# Allegro board WDMB-0006A-V01.brd
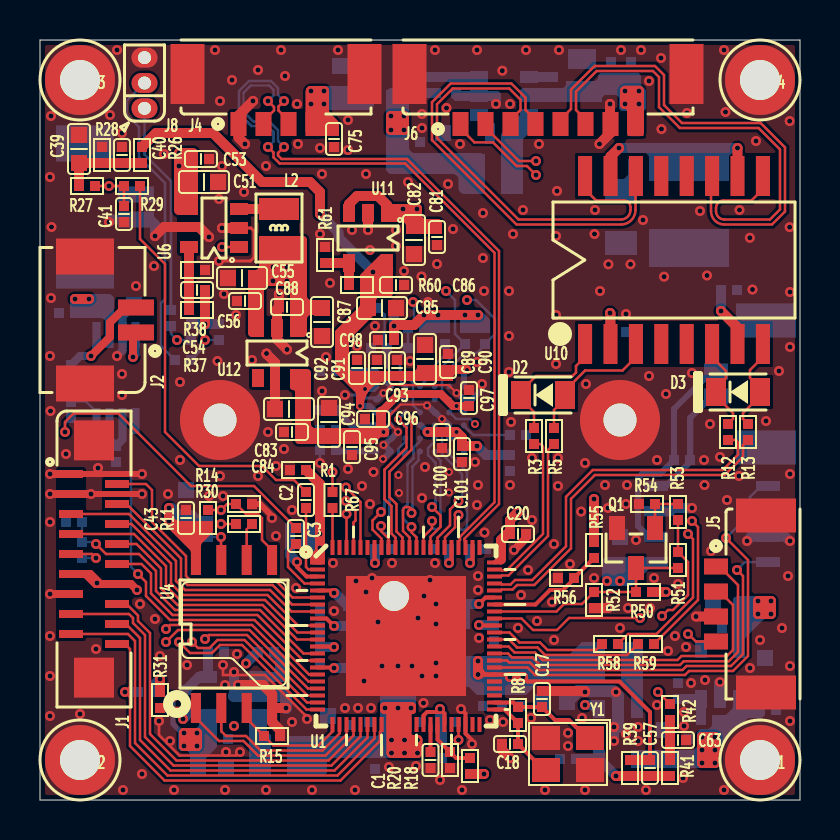
[diagram p0: board, top side]
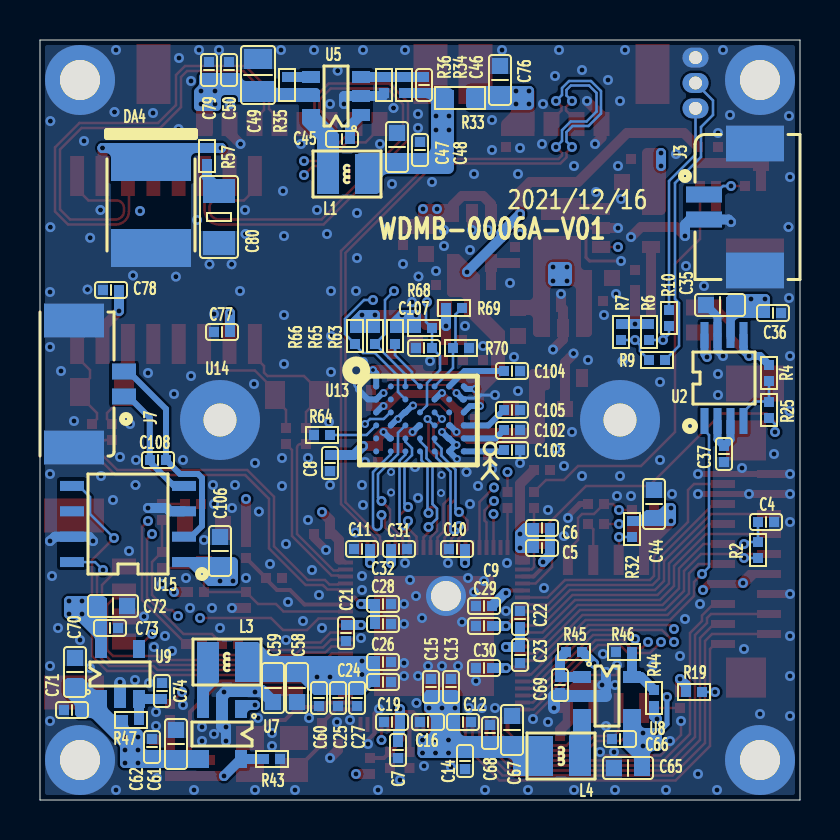
[diagram p1: board, bottom side, seen from below]

Outline 38 x 38 mm; copper layers: TOP, GND, POWER, BOTTOM. Coordinates in mm from the lower left corner of the outline.
Outline path: 0,38 38,38 38,0 0,0 0,38

## Design rules (mm)
net group CAM_RX0_0: nets CAM_RX0_0N CAM_RX0_0P
net group CAM_RX0_1: nets CAM_RX0_1N CAM_RX0_1P
net group CAM_RX0_3: nets CAM_RX0_3N CAM_RX0_3P
net group CAM_RX0_4: nets CAM_RX0_4N CAM_RX0_4P
net group CAM_RX0_CLK: nets CAM_RX0_CLKN CAM_RX0_CLKP
net group DP1: nets N20551619 N20551621
net group DP2: nets N20551631 N20551633
net group DP3: nets USB_DM USB_DP
net group EPHY_RX: nets EPHY_RXN EPHY_RXP
net group EPHY_TX: nets EPHY_TXN EPHY_TXP
net group RX_D: nets RX_D+ RX_D-
net group TX_D: nets TX_D+ TX_D-

## Placement (name value [footprint] x y rotation side)
C1  0.1uF  [C0402]  19.52 2 270 top
C2  2.2uF  [C0402]  13.3 15 270 top
C3  2.2uF  [C0402]  12.8 13.2 90 top
C4  1uF  [C0402]  1.7 13.9 180 bottom
C5  4.7uF  [C0402]  12.9 12.6 180 bottom
C6  0.1uF  [C0402]  12.9 13.6 180 bottom
C7  2.2uF  [C0402]  20.1 2.5 270 bottom
C8  0.1uF  [C0402]  23.5 16.85 270 bottom
C9  0.1uF  [C0402]  15.8 9.7 0 bottom
C10  0.1uF  [C0402]  17.15 12.55 0 bottom
C11  0.1uF  [C0402]  21.9 12.55 0 bottom
C12  4.7uF  [C0402]  16.85 3.9 180 bottom
C13  1uF  [C0402]  17.45 5.65 90 bottom
C14  1uF  [C0402]  16.75 1.95 270 bottom
C15  0.1uF  [C0402]  18.45 5.65 90 bottom
C16  0.1uF  [C0402]  18.6 3.9 0 bottom
C17  12pF  [C0402]  25.1 5.05 90 top
C18  12pF  [C0402]  23.5 2.8 180 top
C19  0.1uF  [C0402]  20.4 3.9 0 bottom
C20  2.2uF  [C0402]  23.9 13.3 0 top
C21  2.2uF  [C0402]  22.7 8.35 270 bottom
C22  0.1uF  [C0402]  14 9.05 90 bottom
C23  0.1uF  [C0402]  14 7.25 270 bottom
C24  4.7uF  [C0402]  20.85 5.9 180 bottom
C25  4.7uF  [C0402]  23.1 5.1 270 bottom
C26  1uF  [C0402]  20.85 6.9 180 bottom
C27  1uF  [C0402]  22.15 5.1 270 bottom
C28  1uF  [C0402]  20.85 8.8 180 bottom
C29  0.1uF  [C0402]  15.8 8.7 0 bottom
C30  0.1uF  [C0402]  15.8 6.6 0 bottom
C31  1uF  [C0402]  20.05 12.55 180 bottom
C32  0.1uF  [C0402]  20.85 9.8 180 bottom
C35  22uF  [C0603]  4 24.75 0 bottom
C36  0.1uF  [C0402]  1.35 24.35 180 bottom
C37  1uF  [C0402]  3.8 17.3 90 bottom
C39  22uF  [C0603]  1.95 32.55 270 top
C40  0.1uF  [C0402]  4.1 32.25 270 top
C41  100pF  [C0402]  4.2 29.3 90 top
C43  0.1uF  [C0402]  7.3 14.1 90 top
C44  22uF  [C0603]  7.3 14.8 90 bottom
C45  0.1uF  [C0402]  22.9 33.05 0 bottom
C46  100pF  [C0402]  18.8 35.75 270 bottom
C47  22uF  [C0603]  20.15 32.65 90 bottom
C48  0.1uF  [C0402]  19 32.5 90 bottom
C49  22uF/16V  [C0805]  27.1 36.25 90 bottom
C50  0.1uF/16V  [C0402]  28.55 36.5 90 bottom
C51  10uF  [C0603]  8.2 30.9 0 top
C53  0.1uF  [C0402]  8.05 32.05 0 top
C54  NC/33pF  [C0402]  7.85 25.5 0 top
C55  22uF  [C0603]  10.1 26.1 180 top
C56  0.1uF  [C0402]  10.25 24.95 180 top
C57  100pF  [C0402]  30.5 1.6 90 top
C58  22uF  [C0603]  25.15 5.6 270 bottom
C59  10uF  [C0603]  26.35 5.6 270 bottom
C60  0.1uF  [C0402]  24.05 5.1 270 bottom
C61  10uF  [C0603]  31.2 2.8 90 bottom
C62  0.1uF  [C0402]  32.4 2.65 90 bottom
C63  2.2uF  [C0402]  31.9 3 0 top
C65  10uF  [C0603]  8.6 1.6 0 bottom
C66  0.1uF  [C0402]  9 3.05 0 bottom
C67  10uF  [C0603]  14.4 3.5 90 bottom
C68  4.7uF  [C0402]  15.5 3.35 90 bottom
C69  0.1uF  [C0402]  12 5.75 270 bottom
C70  10uF  [C0603]  36.25 6.4 90 bottom
C71  0.1uF  [C0402]  36.4 4.5 0 bottom
C72  10uF  [C0603]  34.35 9.7 180 bottom
C73  0.1uF  [C0402]  34.5 8.6 180 bottom
C74  0.1uF  [C0402]  31.9 5.45 90 bottom
C75  0.1uF  [C0402]  14.7 33.05 270 top
C76  22uF  [C0603]  15 36 90 bottom
C77  0.1uF  [C0402]  28.9 23.4 180 bottom
C78  0.1uF  [C0402]  34.45 25.5 180 bottom
C79  0.1uF/16V  [C0402]  29.55 36.5 90 bottom
C80  1nF/2KV  [C1206]  29.05 29.15 90 bottom
C81  0.1uF  [C0402]  19.85 28.15 270 top
C82  10uF  [C0603]  18.7 28 270 top
C83  10uF  [C0603]  12.45 19.55 180 top
C84  0.1uF  [C0402]  12.6 18.4 180 top
C85  10uF  [C0603]  17.1 24.6 0 top
C86  0.1uF  [C0402]  17.8 25.75 0 top
C87  10uF  [C0603]  14.1 23.9 270 top
C88  0.1uF  [C0402]  12.35 24.65 180 top
C89  10uF  [C0603]  19.25 22.05 90 top
C90  4.7uF  [C0402]  20.4 21.9 90 top
C91  0.1uF  [C0402]  16.85 21.6 270 top
C92  0.1uF  [C0402]  15.85 21.6 270 top
C93  0.1uF  [C0402]  17.85 21.6 270 top
C94  10uF  [C0603]  14.45 18.9 90 top
C95  4.7uF  [C0402]  15.6 17.65 270 top
C96  0.1uF  [C0402]  16.65 19.05 0 top
C97  0.1uF  [C0402]  21.45 20.1 270 top
C98  0.1uF  [C0402]  17.3 23 180 top
C100  0.1uF  [C0402]  20.1 18 90 top
C101  4.7uF  [C0402]  21.1 17.3 90 top
C102  2.2uF  [C0402]  14.4 18.5 0 bottom
C103  2.2uF  [C0402]  14.4 17.5 0 bottom
C104  2.2uF  [C0402]  14.4 21.45 0 bottom
C105  2.2uF  [C0402]  14.4 19.5 0 bottom
C106  10uF  [C0603]  29 12.45 90 bottom
C107  0.1uF  [C0402]  18.8 22.6 0 bottom
C108  0.1uF  [C0402]  32.1 17 180 bottom
D2  NC/XXX  [SOD323_1D4X1D8]  25.15 20.25 180 top
D3  NC/XXX  [SOD323_1D4X1D8]  34.9 20.4 180 top
DA4  SMBJ14A  [D_SMB_5D6X4D0]  32.45 29.75 90 bottom
EPAD_HOLE1  H1  [M_1D5_2D0]  17.7 10.2 0 top
H1  H1  [M_2D0_3D5]  36 2 0 top
H2  H1  [M_2D0_3D5]  2 2 0 top
H3  H1  [M_2D0_3D5]  2 36 0 top
H4  H1  [M_2D0_3D5]  36 36 0 top
J1  FPC18/0.5MM  [FPC18_3D5X14D6_1D0]  2.7 12.05 270 top
J2  WB1252B-02R-TAND  [WF2_4D4X7D25_1D25_SMD_L]  4.8 24 270 top
J3  WB1252B-02R-TAND  [WF2_4D4X7D25_1D25_SMD_L]  4.8 29.65 90 bottom
J4  1.25-4ALT  [WF4_3D5X9D5_1D25_SMD_L]  11.8 33.4 180 top
J5  1.25-4ALT  [WF4_3D5X9D5_1D25_SMD_L]  33.4 9.8 90 top
J6  1.25-8ALT  [WF8_3D5X14D5_1D25_SMD_L]  25.4 33.4 180 top
J7  1.25-2ALT  [WF2_3D5X7D0_1D25_SMD_L]  33.4 20.8 270 bottom
J8  Header_M / 3X1 /1.25mm  [JMP_1X3_1D27]  5.22 35.85 90 top
L1  WPN252012H2R2MT_2.2uH_2A  [L1008]  22.65 31.3 180 bottom
L2  WPN252012H2R2MT_2.2uH_2A  [L1008]  11.95 28.6 270 top
L3  WPN252012H1R0MT_1uH_4A  [L1008]  28.65 6.9 180 bottom
L4  WPN252012E1R0MT_1uH_3A  [L1008]  11.95 2.2 0 bottom
Q1  S9013  [SOT23_BEC]  29.8 12.6 180 top
R1  0R  [R0402]  12.9 16.5 180 top
R2  33R  [R0402]  2.1 12.5 270 bottom
R3  5.1R  [R0402]  24.7 18.2 90 top
R4  33K  [R0402]  1.55 21.35 270 bottom
R5  5.1R  [R0402]  25.7 18.2 90 top
R6  4.7K  [R0402]  7.55 23.4 270 bottom
R7  4.7K  [R0402]  8.95 23.4 270 bottom
R8  1M  [R0402]  23.9 4.25 90 top
R9  100R  [R0402]  7.15 22 0 bottom
R10  100R  [R0402]  6.55 24.1 270 bottom
R11  NC/4.7K  [R0402]  8.4 14.1 90 top
R12  5.1R  [R0402]  34.4 18.4 90 top
R13  5.1R  [R0402]  35.4 18.4 90 top
R14  4.7K  [R0402]  10.2 14.8 0 top
R15  4.7K  [R0402]  11.6 3.2 0 top
R18  30K/1%  [R0402]  21.5 1.7 270 top
R19  4.7K  [R0402]  5.3 5.4 180 bottom
R20  10K/1%  [R0402]  20.5 2 90 top
R25  10K  [R0402]  1.55 19.5 270 bottom
R26  470R  [R0402]  5.1 32.25 90 top
R27  2.2K  [R0402]  2.35 30.7 0 top
R28  1K  [R0402]  3.1 32.25 270 top
R29  33R  [R0402]  4.6 30.7 0 top
R30  33R  [R0402]  10.2 13.8 180 top
R31  4.7K  [R0402]  6 5 270 top
R32  4.7K  [R0402]  8.4 13.55 270 bottom
R33  0R  [R0603]  17 35.1 0 bottom
R34  100K/1%  [R0402]  19.8 35.75 90 bottom
R35  100K  [R0402]  25.65 35.75 270 bottom
R36  13K/1%  [R0402]  20.8 35.75 270 bottom
R37  100K/1%  [R0402]  7.85 24.5 180 top
R38  22.6K/1%  [R0402]  7.85 26.5 0 top
R39  10K/1%  [R0402]  29.5 1.6 270 top
R41  40.2K/1%  [R0402]  31.5 1.6 270 top
R42  1K  [R0402]  31.5 4.4 270 top
R43  20K/1%  [R0402]  26.4 2.05 180 bottom
R44  15K/1%  [R0402]  7.3 5.1 270 bottom
R45  100K  [R0402]  11.3 7.4 180 bottom
R46  12K/1%  [R0402]  8.8 7.4 180 bottom
R47  51K  [R0402]  33.45 4 180 bottom
R50  10K  [R0402]  30.2 10.4 0 top
R51  NC/1K  [R0402]  31.9 12 270 top
R52  NC/6.8K  [R0402]  27.7 10 90 top
R53  4.7K  [R0402]  31.9 14.4 90 top
R54  4.7K  [R0402]  30.35 14.8 0 top
R55  NC/22K  [R0402]  27.7 12.5 90 top
R56  12K  [R0402]  26.3 11.1 0 top
R57  75R/1%  [R0402]  29.65 32.2 270 bottom
R58  1K  [R0402]  28.5 7.8 0 top
R59  1K  [R0402]  30.3 7.8 180 top
R60  30K/1%  [R0402]  15.85 25.75 180 top
R61  12K/1%  [R0402]  14.25 27.25 270 top
R63  4.7K  [R0402]  20.25 23.2 90 bottom
R64  NC/0R  [R0402]  23.9 18.25 180 bottom
R65  4.7K  [R0402]  21.25 23.2 90 bottom
R66  4.7K  [R0402]  22.25 23.2 90 bottom
R67  33R  [R0402]  14.62 15 270 top
R68  4.7K  [R0402]  18.8 23.6 0 bottom
R69  NC/4.7K  [R0402]  17.3 24.6 0 bottom
R70  0R  [R0402]  16.95 22.6 0 bottom
U1  CV182XA_QFN88  [QFN88_9D0X9D0_0D35_E]  18.3 8.2 0 top
U2  SGM4890  [MSOP8_3D0X3D0_0D65]  3.8 21.1 90 bottom
U4  NOR/FLASH/16MB/3.3V  [SOP8_5D28X5D28_1D27]  9.7 8.3 90 top
U5  ETA8110  [SOT236_2D9X1D6_0D95]  23.2 35.2 90 bottom
U6  ETA3414S2F  [SOT235_2D9X1D6_0D95]  8.7 28.6 90 top
U7  ETA3418S2F  [SOT235_2D9X1D6_0D95]  28.9 3.3 0 bottom
U8  ETA3414S2F  [SOT235_2D9X1D6_0D95]  9.65 5.2 270 bottom
U9  ETA5050V18S2F  [SOT235_2D9X1D6_0D95]  34 6.3 180 bottom
U10  M1601AG  [TF16_12D1X5D1_1D27]  31.7 27 0 top
U11  ETA5050V0S2F  [SOT235_2D9X1D6_0D95]  16.4 28.1 180 top
U12  ETA5050V12S2F  [SOT235_2D9X1D6_0D95]  11.85 22.35 180 top
U13  SC200AI/GC4653  [CSP41_4D438X5D896_0D65_0D73]  19 19 180 bottom
U14  Holder_A02_037_026  [LENS_IR_24D0X17_20D0]  19 19 90 bottom
U15  BA6208F  [SOP8_4D4X5D0_1D27]  33.6 13.8 0 bottom
Y1  25MHz/12.5pF  [XTAL_3D2X2D5]  26.4 2.3 180 top

## Library data of the parts
C1-C32 C35-C37 C39-C41 C43-C51 C53-C63 C65-C98 C100-C108 = C
D2 D3 = D_0
DA4 = DIODE SCHOTTKY_0
EPAD_HOLE1 H1-H4 = H
J1 = CON12_0
J2 J3 = CON6_5
J4 J5 = CON6_6
J6 = CON6_2
J7 = CON2_1
J8 = HEADER 3X1_0.25mm
L1-L4 = L
Q1 = 2N1069_4
R1-R15 R18-R20 R25-R39 R41-R47 R50-R61 R63-R70 = R
U1 = Mars_CV182X_QFN88
U2 = SGM4890YMS
U4 = ESMT_SPINOR_WSON8_5
U5 = G2832TB1U_0
U6-U8 = G2822T11U_0
U9 U12 = G9091-180T11U
U10 = M1601AG
U11 = LDO-PT5108/RT9013_2
U13 = IMX327LQR-C_1
U14 = CAM_Holder
U15 = BA6208F_1
Y1 = XTAL_25MHz_7

## Footprints (pads in the part's own frame, mm; a bottom-side part is the same pattern mirrored in y, then rotated)
C0402
  rect 0.5x0.5 smd: 1(-0.4,0) 2(0.4,0)
C0603
  rect 0.8x0.8 smd: 1(-0.7,0) 2(0.7,0)
C0805
  rect 1x1.4 smd: 1(-0.8,0) 2(0.8,0)
C1206
  rect 1.2x1.6 smd: 1(-1.3,0) 2(1.3,0)
CSP41_4D438X5D896_0D65_0D73
  round 0.3 smd: A1(-2.19,1.679) A2(-1.46,1.679) A3(-0.73,1.679) A4(0,1.679) A5(0.73,1.679) A6(1.46,1.679) A7(2.19,1.679) B1(-2.19,1.029) B2(-1.46,1.029) B3(-0.73,1.029) B5(0.73,1.029) B6(1.46,1.029) B7(2.19,1.029) C1(-2.19,0.379) C2(-1.46,0.379) C3(-0.73,0.379) C4(0,0.379) C5(0.73,0.379) C6(1.46,0.379) C7(2.19,0.379) D1(-2.19,-0.271) D2(-1.46,-0.271) D3(-0.73,-0.271) D4(0,-0.271) D5(0.73,-0.271) D6(1.46,-0.271) D7(2.19,-0.271) E1(-2.19,-0.921) E2(-1.46,-0.921) E3(-0.73,-0.921) E4(0,-0.921) E5(0.73,-0.921) E6(1.46,-0.921) E7(2.19,-0.921) F1(-2.19,-1.571) F2(-1.46,-1.571) F3(-0.73,-1.571) F4(0,-1.571) F5(0.73,-1.571) F6(1.46,-1.571) F7(2.19,-1.571)
D_SMB_5D6X4D0
  rect 1.9x4 smd: N(2.15,0) P(-2.15,0)
FPC18_3D5X14D6_1D0
  rect 0.4x1.2 smd: 1(-4.25,-1.15) 2(-3.75,1.15) 3(-3.25,-1.15) 4(-2.75,1.15) 5(-2.25,-1.15) 6(-1.75,1.15) 7(-1.25,-1.15) 8(-0.75,1.15) 9(-0.25,-1.15) 10(0.25,1.15) 11(0.75,-1.15) 12(1.25,1.15) 13(1.75,-1.15) 14(2.25,1.15) 15(2.75,-1.15) 16(3.25,1.15) 17(3.75,-1.15) 18(4.25,1.15)
  rect 2x2 smd: 19(-5.93,0) 20(5.93,0)
JMP_1X3_1D27
  oval 1x1.3 hole 0.65: 1(-1.27,0) 2(0,0) 3(1.27,0)
L1008
  rect 1.1x2 smd: 1(-0.95,0) 2(0.95,0)
LENS_IR_24D0X17_20D0
  round 4 hole 1.65: 1(0,10) 2(0,-10)
M_1D5_2D0
  round 2 hole 1.5: 1(0,0)
M_2D0_3D5
  round 3.5 hole 2: 1(0,0)
MSOP8_3D0X3D0_0D65
  rect 1.3x0.4 smd: 1(-2.15,0.975) 2(-2.15,0.325) 3(-2.15,-0.325) 4(-2.15,-0.975) 5(2.15,-0.975) 6(2.15,-0.325) 7(2.15,0.325) 8(2.15,0.975)
QFN88_9D0X9D0_0D35_E
  rect 0.75x0.2 smd: 1(-4.425,3.675) 2(-4.425,3.325) 3(-4.425,2.975) 4(-4.425,2.625) 5(-4.425,2.275) 6(-4.425,1.925) 7(-4.425,1.575) 8(-4.425,1.225) 9(-4.425,0.875) 10(-4.425,0.525) 11(-4.425,0.175) 12(-4.425,-0.175) 13(-4.425,-0.525) 14(-4.425,-0.875) 15(-4.425,-1.225) 16(-4.425,-1.575) 17(-4.425,-1.925) 18(-4.425,-2.275) 19(-4.425,-2.625) 20(-4.425,-2.975) 21(-4.425,-3.325) 22(-4.425,-3.675) 45(4.425,-3.675) 46(4.425,-3.325) 47(4.425,-2.975) 48(4.425,-2.625) 49(4.425,-2.275) 50(4.425,-1.925) 51(4.425,-1.575) 52(4.425,-1.225) 53(4.425,-0.875) 54(4.425,-0.525) 55(4.425,-0.175) 56(4.425,0.175) 57(4.425,0.525) 58(4.425,0.875) 59(4.425,1.225) 60(4.425,1.575) 61(4.425,1.925) 62(4.425,2.275) 63(4.425,2.625) 64(4.425,2.975) 65(4.425,3.325) 66(4.425,3.675)
  rect 0.2x0.75 smd: 23(-3.675,-4.425) 24(-3.325,-4.425) 25(-2.975,-4.425) 26(-2.625,-4.425) 27(-2.275,-4.425) 28(-1.925,-4.425) 29(-1.575,-4.425) 30(-1.225,-4.425) 31(-0.875,-4.425) 32(-0.525,-4.425) 33(-0.175,-4.425) 34(0.175,-4.425) 35(0.525,-4.425) 36(0.875,-4.425) 37(1.225,-4.425) 38(1.575,-4.425) 39(1.925,-4.425) 40(2.275,-4.425) 41(2.625,-4.425) 42(2.975,-4.425) 43(3.325,-4.425) 44(3.675,-4.425) 67(3.675,4.425) 68(3.325,4.425) 69(2.975,4.425) 70(2.625,4.425) 71(2.275,4.425) 72(1.925,4.425) 73(1.575,4.425) 74(1.225,4.425) 75(0.875,4.425) 76(0.525,4.425) 77(0.175,4.425) 78(-0.175,4.425) 79(-0.525,4.425) 80(-0.875,4.425) 81(-1.225,4.425) 82(-1.575,4.425) 83(-1.925,4.425) 84(-2.275,4.425) 85(-2.625,4.425) 86(-2.975,4.425) 87(-3.325,4.425) 88(-3.675,4.425)
  rect 6x6 smd: 89(0,0)
R0402
  rect 0.5x0.5 smd: 1(-0.4,0) 2(0.4,0)
R0603
  rect 0.8x0.8 smd: 1(-0.7,0) 2(0.7,0)
SOD323_1D4X1D8
  rect 1x1.4 smd: N(1.1,0) P(-1.1,0)
SOP8_4D4X5D0_1D27
  rect 1.2x0.5 smd: 1(-2.8,1.905) 2(-2.8,0.635) 3(-2.8,-0.635) 4(-2.8,-1.905) 5(2.8,-1.905) 6(2.8,-0.635) 7(2.8,0.635) 8(2.8,1.905)
SOP8_5D28X5D28_1D27
  rect 1.5x0.5 smd: 1(-3.7,1.905) 2(-3.7,0.635) 3(-3.7,-0.635) 4(-3.7,-1.905) 5(3.7,-1.905) 6(3.7,-0.635) 7(3.7,0.635) 8(3.7,1.905)
SOT23_BEC
  rect 0.8x1.2 smd: B(-0.95,-1) C(0,1) E(0.95,-1)
SOT235_2D9X1D6_0D95
  rect 0.6x0.9 smd: 1(-0.95,-1.25) 2(0,-1.25) 3(0.95,-1.25) 4(0.95,1.25) 5(-0.95,1.25)
SOT236_2D9X1D6_0D95
  rect 0.6x0.9 smd: 1(-0.95,-1.25) 2(0,-1.25) 3(0.95,-1.25) 4(0.95,1.25) 5(0,1.25) 6(-0.95,1.25)
TF16_12D1X5D1_1D27
  rect 0.7x2 smd: 1(-4.445,-4.2) 2(-3.175,-4.2) 3(-1.905,-4.2) 4(-0.635,-4.2) 5(0.635,-4.2) 6(1.905,-4.2) 7(3.175,-4.2) 8(4.445,-4.2) 9(4.445,4.2) 10(3.175,4.2) 11(1.905,4.2) 12(0.635,4.2) 13(-0.635,4.2) 14(-1.905,4.2) 15(-3.175,4.2) 16(-4.445,4.2)
WF2_3D5X7D0_1D25_SMD_L
  rect 0.8x1.2 smd: 1(0.625,-0.4) 2(-0.625,-0.4)
  rect 1.7x3 smd: 3(-3.175,-2.9) 4(3.175,-2.9)
WF2_4D4X7D25_1D25_SMD_L
  rect 0.8x1.8 smd: 1(0.625,0) 2(-0.625,0)
  rect 1.8x2.9 smd: 3(-3.175,-2.55) 4(3.175,-2.55)
WF4_3D5X9D5_1D25_SMD_L
  rect 0.8x1.2 smd: 1(1.875,-0.4) 2(0.625,-0.4) 3(-0.625,-0.4) 4(-1.875,-0.4)
  rect 1.7x3 smd: 5(-4.425,-2.9) 6(4.425,-2.9)
WF8_3D5X14D5_1D25_SMD_L
  rect 0.8x1.2 smd: 1(4.375,-0.4) 2(3.125,-0.4) 3(1.875,-0.4) 4(0.625,-0.4) 5(-0.625,-0.4) 6(-1.875,-0.4) 7(-3.125,-0.4) 8(-4.375,-0.4)
  rect 1.7x3 smd: 9(-6.925,-2.9) 10(6.925,-2.9)
XTAL_3D2X2D5
  rect 1.4x1.2 smd: 1(-1.1,-0.8) 2(1.1,-0.8) 3(1.1,0.8) 4(-1.1,0.8)

## Nets
5V_USB_OUT: C75.1 C76.1 J4.4 R33.1 R55.2
12V_IN: C49.1 C50.1 C79.1 J6.8 R35.2 U5.5(VIN)
AVDD: C85.1 C86.1 C89.1 C90.1 C91.2 C92.2 C93.2 R26.2 R60.1 U11.5(OUT) U13.A1(AVDD#A1) U13.A7(AVDD#A7) U13.C7(AVDD#C7)
DVDD: C83.1 C84.1 C94.1 C95.1 C96.2 C97.2 U12.5(VOUT) U13.B5(DVDD#B5) U13.C1(DVDD#C1) U13.D6(DVDD#D6)
GND_SIGNAL: C5.1 C6.1 R1.1 U1.1(VSS18A_AUD)
P5V_IN: C35.1 C36.1 C46.2 C47.1 C48.1 C51.1 C53.1 C61.1 C62.1 C65.1 C66.1 C70.1 C71.1 C106.1 L1.2 R18.2 R33.2 R34.1 R45.2 R47.1 U2.6(VDD) U6.4(VIN) U7.1(EN) U7.4(VIN) U8.4(VIN) U9.1(VIN) U15.1(VCC)
VDDC: C24.1 C25.1 C26.1 C27.1 C28.1 C29.1 C30.1 C31.1 C32.1 C57.2 C58.1 C59.1 C60.1 L3.2 R39.1 U1.9(VDDC#9) U1.16(VDDC#16) U1.50(VDDC#50) U1.61(VDDC#61) U1.71(VDDC#71)
VDDQ_1.35V: C12.1 C13.1 C14.1 C15.1 C16.1 C67.1 C68.1 L4.2 R44.2 U1.31(VDDQ_DRAM#31) U1.32(VDDQ#32) U1.33(VDDQ#33) U1.34(VDDQ_DRAM#34)
AADC_AIN_MIC2: C2.1 R29.2
ADAC_AOUT_R: C3.2 R25.2
CAM_I2C2_SCL: R65.1 U1.86((CV_4WTCK_CR_2WTCK/VI0_D[12]/VO) U13.A3(SCL)
CAM_I2C2_SDA: R66.1 U1.85((CV_4WTDO_CR_2WTMS/VI0_D[11]/VO) U13.B3(SDA)
CAM_MCLK0: R67.2 U1.88(((PAD_MIPI_TXP0)/VI0_D[10]/VO_D)
CAM_RST0: C107.1 R68.1 U1.84((CV_4WTDI_CR_SCL0/VI0_D[14]/VO_) U13.C4(XSHUTDN)
CAM_RX0_0N: U1.80(((PAD_MIPIRX0N)/VI0_D[7]/VO_D[6) U13.F5(D8/MDN0)
CAM_RX0_0P: U1.81(((PAD_MIPIRX0P)/VI0_D[8]/VO_D[5) U13.E5(D9/MDP0)
CAM_RX0_1N: U1.74((CV_4WTDO_CR_2WTMS/VI0_D[1]/VI1) U13.E3(D5/MDN1)
CAM_RX0_1P: U1.75((CV_4WTCK_CR_2WTCK/VI0_D[2]/VI1) U13.F3(D6/MDP1)
CAM_RX0_3N: U1.78(((PAD_MIPIRX1N)/VI0_D[5]/VO_D[8) U13.D5(D10)
CAM_RX0_3P: U1.79(((PAD_MIPIRX1P)/VI0_D[6]/VO_D[7) U13.C5(D11)
CAM_RX0_4N: U1.72((CV_4WTDI_CR_SCL0/VI0_CLK/VI1_D) U13.F2(D3)
CAM_RX0_4P: U1.73((CV_4WTMS_CR_SDA0/VI0_D[0]/VI1_) U13.D3(D4)
CAM_RX0_CLKN: U1.76(((PAD_MIPIRX2N)/VI0_D[3]/VO_D[1) U13.E4(D7/MCN)
CAM_RX0_CLKP: U1.77(((PAD_MIPIRX2P)/VI0_D[4]/VO_D[9) U13.F4(PCLK/MCP)
CDS+: Q1.C R50.1 R51.2 R52.2 U1.59(((ADC1)/XGPIOB[3]/KEY_COL2)___[)
CHASSI_GND: C1.2 C4.2 C7.2 C8.2 C9.2 C10.2 C11.2 C12.2 C13.2 C14.2 C15.2 C16.2 C17.2 C18.2 C19.2 C20.2 C21.2 C22.2 C23.2 C24.2 C25.2 C26.2 C27.2 C28.2 C29.2 C30.2 C31.2 C32.2 C35.2 C36.2 C37.1 C39.1 C40.1 C41.1 C43.2 C44.2 C47.2 C48.2 C49.2 C50.2 C51.2 C53.2 C55.2 C56.2 C58.2 C59.2 C60.2 C61.2 C62.2 C63.2 C65.2 C66.2 C67.2 C68.2 C69.2 C70.2 C71.2 C72.2 C73.2 C74.2 C75.2 C76.2 C77.1 C78.1 C79.2 C80.1 C81.2 C82.2 C83.2 C84.2 C85.2 C86.2 C87.2 C88.2 C89.2 C90.2 C91.1 C92.1 C93.1 C94.2 C95.2 C96.1 C97.1 C98.2 C100.1 C101.1 C102.1 C103.1 C104.1 C105.1 C106.2 C107.2 DA4.P EPAD_HOLE1.1(H) H1.1(H) H2.1(H) H3.1(H) H4.1(H) J1.1 J1.3 J1.13 J1.19 J1.20 J2.3(GND1) J2.4(GND2) J3.2 J3.3(GND1) J3.4(GND2) J4.1 J4.5 J4.6 J5.3 J5.5 J5.6 J6.7 J6.9 J6.10 J7.3 J7.4 J8.3 Q1.E R1.2 R14.2 R15.2 R20.1 R28.1 R36.2 R38.2 R43.2 R46.1 R52.1 R54.1 R56.1 R61.1 R64.1 R70.1 U1.42((PWR_PTEST)___[PD]|[FS]________) U1.89(E-PAD) U2.7(GND) U4.4(VSS) U5.2(GND) U6.2(GND) U7.2(GND) U8.2(GND) U9.2(GND) U11.2(GND) U12.2(GND) U13.B1(AGND#B1) U13.B7(AGND#B7) U13.C3(DGND#C3) U13.D2(DGND#D2) U13.E6(DGND#E6) U13.F6(DGND#F6) U14.1 U14.2 U15.3(GND1) U15.7(GND2) Y1.2(G1) Y1.4(G2)
EPHY_LNK: R59.2 U1.55((PWR_SD1_CMD_VO36/SPI2_SDO/IIC3)
EPHY_RXN: R13.1 U1.62(((PAD_ETH_RXM)/UART3_CTS/CAM_MC)
EPHY_RXP: R12.1 U1.63(((PAD_ETH_RXP)/UART3_TX/CAM_MCL)
EPHY_SPD: R58.1 U1.56((PWR_SD1_CLK_VO37/SPI2_SCK/IIC3)
EPHY_TXN: R5.1 U1.64(((PAD_ETH_TXM)/UART3_RTS/IIC1_S)
EPHY_TXP: R3.1 U1.65(((PAD_ETH_TXP)/UART3_RX/IIC1_SC)
I2C_ID_SEL: R69.1 R70.2 U13.A5(SID)
INCK: R67.1 U13.C2(EXTCLK)
IOIN: J1.16 U1.28((CV_SCL0__CR_4WTDI/UART1_TX/UAR)
IOOUT: J1.17 U1.29((CV_SDA0__CR_4WTDO/UART1_RX/UAR)
IOVDD: C7.1 C8.1 C9.1 C10.1 C11.1 C19.1 C72.1 C73.1 C98.1 C100.2 C101.2 R50.2 R63.2 R65.2 R66.2 R68.2 R69.2 U1.5(VDD18A_AUD) U1.36(VDDIO_RTC) U1.39((PWR_RSTN)___[PU]|[FS]_________) U1.68(VDD18A_USB_PLL_ETH) U1.82(VDD18A_MIPI) U9.5(VOUT) U13.D4(DOVDD#D4) U13.E2(DOVDD#E2)
IRCUT_ENA: U1.52((PWR_SD1_D2_VO33/IIC1_SCL/UART2) U15.8(AIN)
IRCUT_ENB: U1.51((PWR_SD1_D3_VO32/SPI2_CS_X/IIC1) U15.5(BIN)
IRLED_PWM: J5.1 U1.53((PWR_SD1_D1_VO34/IIC1_SDA/UART2)
LNK_LED: J6.2 R59.1
MEMS_MIC1_VDD: C39.2 C40.2 R26.1 R27.1 R28.2
MIC1_OUTPUT: C41.2 J3.1 R27.2 R29.1
PWM0_BUCK: R42.1 U1.58((PWM[0]/XGPIOB[0])___[PD]|[FS]_)
PWR_SEQ2: U1.41((PWR_SEQ2/PWR_GPIO[4])___[PD]|_) U6.1(EN)
PWR_VBAT_DET: R18.1 R20.2 U1.38((PWR_VBAT_DET(PWRSAR.VIN3))___[)
PWRDOWN: R63.1 U13.A4(PWDNB)
RESET: J1.18 R19.2 U1.30((AUX0/XGPIOA[30]/IIS1_MCLK/VO_D)
RX_D+: J6.5 U10.11(RX+)
RX_D-: J6.6 U10.9(RX-)
SD_PWR_EN: J1.10 U1.15((SDIO0_PWR_EN/XGPIOA[14])___[PD)
SD_SD0_CD: C4.1 R2.1 U1.14((SDIO0_CD/XGPIOA[13])___[PU]|__)
SD_SD0_CLK: J1.2 U1.6((SDIO0_CLK/IIC1_SDA/SPI0_SCK/XG)
SD_SD0_CMD: J1.4 U1.7((SDIO0_CMD/IIC1_SCL/SPI0_SDO/XG)
SD_SD0_D0: J1.5 U1.8((SDIO0_D[0]/CAM_MCLK1/SPI0_SDI/)
SD_SD0_D1: J1.6 U1.10((SDIO0_D[1]/IIC1_SDA/AUX0/XGPIO)
SD_SD0_D2: J1.7 U1.11((SDIO0_D[2]/IIC1_SCL/AUX1/XGPIO)
SD_SD0_D3: J1.8 U1.12((SDIO0_D[3]/CAM_MCLK0/SPI0_CS_X)
SPD_LED: J6.1 R58.2
SPI_CLK: R30.2 U1.21((EMMC_CLK/SPINOR_SCK/SPINAND_CL)
SPI_CS_X: R31.2 U1.25((EMMC_DAT[1]/SPINOR_CS_X/SPINAN) U4.1(CSZ)
SPI_HOLD_X: R32.2 U1.20((EMMC_DAT[2]/SPINOR_HOLD_X/SPIN) U4.7(HOLD#(IO3))
SPI_MISO: U1.24(SPINOR_MISO/SPINAND_MISO/XGPIOA) U4.2(SO(IO1))
SPI_MOSI: R11.2 R14.1 U1.22((EMMC_DAT[0]/SPINOR_MOSI/SPINAN) U4.5(SI(IO0))
SPI_SCK: R30.1 U4.6(SCK)
SPI_VCC: C20.1 C21.1 C22.1 C23.1 C43.1 C44.1 C54.2 C55.1 C56.1 C81.1 C82.1 C87.1 C88.1 J1.11 J1.12 L2.2 R6.1 R7.1 R11.1 R19.1 R31.1 R32.1 R37.1 U1.13(VDDIO_SD0_EMMC) U1.57(VDDIO_SD1) U1.66(VDD33A_ETH_USB) U4.8(VCC) U11.1(IN) U11.3(EN) U12.1(VIN) U12.3(EN)
SPI_WP_X: R15.1 U1.23((EMMC_DAT[3]/SPINOR_WP_X/SPINAN) U4.3(WP#(IO2))
SPK_EN: U1.17(((CAM_RST0--GPIO)/XGPIOA[15])__) U2.1(SHDN)
SYS_XTAL_IN: C18.1 R8.1 U1.45(XTAL_XIN) Y1.3(X2)
SYS_XTAL_OUT: C17.1 R8.2 U1.46(XTAL_XOUT) Y1.1(X1)
TX_D+: J6.3 U10.16(TX+)
TX_D-: J6.4 U10.14(TX-)
UART0_RX: R6.2 R10.2 U1.19((UART0_RX/CAM_MCLK0/PWM[5]/XGPI)
UART0_TX: R7.2 R9.2 U1.18((UART0_TX/CAM_MCLK1/PWM[4]/XGPI)
UART1_RX: J1.15 U1.27((CV_2WTCK_CR_4WTCK/CAM_MCLK1/PW)
UART1_TX: J1.14 U1.26((CV_2WTMS_CR_4WTMS/CAM_MCLK0/PW)
USB_DM: J4.3 U1.70(USB_DM)
USB_DP: J4.2 U1.69(USB_DP)
USB_VBUS_DET: R55.1 R56.2 U1.60((USB_VBUS_DET/XGPIOB[6]/CAM_MCL)
WLED_PWM: J5.2 U1.54((PWR_SD1_D0_VO35/SPI2_SDI/IIC1_)
N19124268: DA4.N R57.1 U10.10(TCM-) U10.15(TCM)
N19124326: C78.2 U10.7(RCT)
N19178192: C45.1 U5.1(BS)
N19178196: C45.2 L1.1 U5.6(SW)
N19178310: C46.1 R34.2 R36.1 U5.3(FB)
N19178371: R35.1 U5.4(EN)
N19299732: L4.1 U8.3(LX)
N19299837: R44.1 R46.2 U8.5(FB)
N19299849: C69.1 R45.1 U8.1(EN)
N19981555: L3.1 U7.3(LX)
N19981677: C57.1 R39.2 R41.2 R43.1 U7.5(FB)
N19981766: C63.1 R41.1 R42.2
N20100926: L2.1 U6.3(LX)
N20101039: C54.1 R37.2 R38.1 U6.5(FB)
N20359461: R60.2 R61.2 U11.4(SNS/NC)
N20419535: C102.2 U13.E7(VREFH)
N20419548: C103.2 U13.F7(VREFN)
N20419561: C104.2 U13.A6(NC2)
N20419574: C105.2 U13.D7(NC3)
N20435624: C74.1 R47.2 U9.3(EN)
N20543108: C2.2 U1.2(((PAD_AUD_AINL_MIC)/XGPIOC[23]/)
N20543141: C3.1 U1.4(((PAD_AUD_AOUTR)/XGPIOC[24]/IIS)
N20543163: C5.2 C6.2 U1.3(AUD_AVREF)
N20543994: J8.2 R9.1
N20546407: J2.1 U2.8(VO2)
N20546461: C37.2 U2.2(BYPASS) U2.3(+IN)
N20546469: J2.2 R4.1 U2.5(VO1)
N20546492: R4.2 R25.1 U2.4(-IN)
N20548092: J8.1 R10.1
N20549401: C80.2 R57.2
N20551524: C77.2 U10.2(TCT)
N20551619: D2.P R5.2 U10.3(TD-)
N20551621: D2.N R3.2 U10.1(TD+)
N20551631: D3.N R12.2 U10.6(RD+)
N20551633: D3.P R13.2 U10.8(RD-)
N20557326: Q1.B R53.2 R54.2
N20557495: J5.4 R51.1 R53.1
N20559056: R64.2 U13.D1(D0)
N20604743: C108.2 J7.2 U15.2(BOUT)
N20605010: C108.1 J7.1 U15.4(AOUT)
N20631063: J1.9 R2.2
N205430461: C1.1 U1.37(VDDC_RTC)

Pads without a net: U1 35 40 43 44 47 48 49 67 83 87; U9 4; U10 4 5 12 13; U12 4; U13 A2 B2 B6 C6 E1 F1; U15 6

## Via types
v1: diameter 0.5, hole 0.25, TOP to BOTTOM, 439 vias
v2: diameter 0.4, hole 0.2, TOP to BOTTOM, 22 vias

## Routing (per net, layer and track width the routed paths; a pad name or vN(x,y) marks a point on that pad's centre or on a via; arc(x,y) is an arc through that point)
5V_USB_OUT: length 36.5
  TOP w0.5: v1(27.7,15.05) R55.2 ; v1(14.2,35.45) v1(13.55,35.45) v1(13.55,34.8) 13.68,34.67 J4.4 13.85,33.62
  POWER w0.5: v1(27.7,15.05) 26.6,16.15 26.6,32.85 23.9,35.45 v1(14.2,35.45)
  vias: v1(14.2,34.8)
12V_IN: length 1.3
  BOTTOM w0.5: R35.2 25.6,35.2 U5.5
  vias: v1(29.25,35.45) v1(29.25,34.8) v1(29.95,35.45) v1(29.95,34.8)
AVDD: length 29.7
  TOP w0.4: C90.1 v2(21.35,21.5) ; v2(16.25,20.55) 16.25,21.15
  TOP w0.5: v1(14,29.3) 14,30.4 13.5,30.9 11.1,30.9 8.65,33.35 5.8,33.35 R26.2 ; U11.5 C86.1 R60.1 16.25,24.6 C85.1 16.4,24.35 15.07,23.02 15.07,21.45 15.36,21.16 15.85,21.16 C92.2 C91.2 C93.2
  BOTTOM w0.3: v2(16,19.7) 16.49,19.7 U13.C7 ; U13.A1 21.19,21.34 v2(21.35,21.5) ; v2(16.25,20.55) 16.68,20.55 U13.A7
  BOTTOM w0.5: v1(16.65,26.4) 14.93,28.12 14.93,28.38 v1(14,29.3)
DVDD: length 14.6
  TOP w0.4: v2(17.18,18.4) 17.1,18.48 ; C97.2 v2(20.82,19.7) 20.65,19.7 20.05,20.3 17.95,20.3 v2(17.9,20.35) 17.9,20.25 17.07,19.43
  TOP w0.5: C96.2 17.05,19.4 17.07,19.43 ; 14.45,18.05 C94.1 ; 14.45,18.05 13.35,18.05 C84.1 13,19.4 C83.1 13.15,20.75 U12.5 ; 14.45,18.05 C95.1 16.55,18.05 16.9,18.4 v2(17.18,18.4)
  BOTTOM w0.3: v2(20.82,19.7) 20.87,19.7 U13.C1 ; v2(17.9,20.35) 17.95,20.35 U13.B5 ; v2(17.18,18.4) 17.5,18.73 U13.D6
GND_SIGNAL: length 6.6
  TOP w0.125: 14,12.03 14,11.88 U1.1
  TOP w0.5: R1.1 14,15.8 v1(14,13.3) v1(14,12.6) 14,12.03
  BOTTOM w0.5: C5.1 v1(14,12.6) ; C6.1 13.7,13.6 v1(14,13.3)
P5V_IN: length 14.5
  TOP w0.5: v1(22.2,1.3) R18.2 ; v1(2.45,25.05) v1(1.75,25.05)
  POWER w0.25: v1(10.3,6.83) 10.55,6.58 10.55,5.4 10.3,5.15 v1(6.65,5.15)
  BOTTOM w0.125: v1(7.2,3.35) v1(7.85,3.35)
  BOTTOM w0.25: v1(6.65,5.15) 6.65,3.8 7.1,3.35 v1(7.2,3.35)
  BOTTOM w0.4: 3.48,24.7 3.48,23.25
  BOTTOM w0.5: R45.2 10.88,7.4 v1(10.3,6.83) ; v1(6.95,31.7) v1(6.95,32.35) ; C46.2 R34.1 ; v1(27.25,4.75) 27.95,4.75 U7.1
  vias: v1(7.2,2.7) v1(7.85,2.7) v1(17.55,34.2) v1(17.55,33.5) v1(18.2,34.2) v1(18.2,33.5) v1(28.35,10.95) v1(29,10.95) v1(33.1,3.15) v1(33.1,2.5) v1(33.1,1.85) v1(33.75,3.15) v1(33.75,2.5) v1(33.75,1.85)
VDDC: length 20.8
  TOP w0.2: v1(14.7,6.6) 14.65,6.62 U1.16 ; v1(21.95,9.8) 22.27,10.12 U1.61 ; U1.71 20.57,11.97 v1(20.45,11.85) ; C57.2 30.5,4.4 28.98,5.92 24.38,5.92 v1(24.15,6.15) ; U1.9 14.32,9.07 v1(14.7,8.7) ; v1(23.5,6.15) 23.38,6.28 v1(21.9,6.28)
  TOP w0.5: C57.2 R39.1 ; v1(21.9,6.28) v1(21.9,6.95) ; v1(24.15,6.15) v1(23.5,6.15)
  BOTTOM w0.5: C28.1 C32.1 v1(21.95,9.8) ; v1(14.7,8.7) C29.1 ; v1(14.7,6.6) C30.1 ; v1(20.45,11.85) C31.1
VDDQ_1.35V: length 11.8
  POWER w0.5: v1(7.15,4.05) 7.47,4.38 10.03,4.38 11.4,3 v1(17.57,3)
  BOTTOM w0.5: R44.2 7.3,4.2 v1(7.15,4.05)
  vias: v1(17.25,4.6) v1(17.57,2.35) v1(17.9,4.6) v1(18.23,3) v1(18.23,2.35) v1(18.55,4.6) v1(18.88,3) v1(18.88,2.35)
AADC_AIN_MIC2: length 21.1
  TOP w0.125: R29.2 5,28.05 6.25,26.8 6.25,18.4 7.95,16.7 11.1,16.7 11.8,16 12.7,16 C2.1
ADAC_AOUT_R: length 15.4
  TOP w0.125: v1(1.25,18.4) 1.25,18.9 1.68,19.32 3.92,19.32 7.55,15.7 10.7,15.7 C3.2
  BOTTOM w0.125: R25.2 1.25,18.8 v1(1.25,18.4)
CAM_I2C2_SCL: length 26.3
  TOP w0.125: v1(15.32,14.3) 15.32,12.62
  POWER w0.125: v1(20.3,25.45) 20.05,25.7 16.25,25.7 12.75,22.2 12.75,15.62 13.68,14.7 14.93,14.7 v1(15.32,14.3)
  BOTTOM w0.125: v1(20.3,25.45) 20.75,25 20.75,23.3 R65.1 19.73,21.28 U13.A3
CAM_I2C2_SDA: length 28.8
  TOP w0.125: v1(15.3,14.95) 15.78,14.47 15.78,13.97 15.68,13.88 U1.85
  POWER w0.125: v1(15.3,14.95) 13.8,14.95 13,15.75 13,22.05 16.35,25.4 19.65,25.4 20.05,25 v1(21.35,25)
  BOTTOM w0.125: U13.B3 20.1,20.4 20.1,21.2 21.25,22.35 21.85,22.35 22.25,22.75 R66.1 22.75,23.3 22.75,24.05 21.8,25 v1(21.35,25)
CAM_MCLK0: length 2
  TOP w0.125: R67.2 U1.88
CAM_RST0: length 24.9
  TOP w0.125: 16.02,12.62 16.02,14.9 v1(15.3,15.62)
  POWER w0.125: v1(18.65,24.9) 18.45,25.1 16.45,25.1 13.25,21.9 13.25,15.88 13.93,15.2 14.88,15.2 v1(15.3,15.62)
  BOTTOM w0.125: v1(18.65,24.9) 18.7,24.85 18.7,23.9 R68.1 C107.1 18,22.2 18,21.5 18.65,20.85 18.65,19.73 U13.C4
CAM_RX0_0N: length 6.3
  TOP w0.125: U1.80 17.43,13.07 17.05,13.45 v1(17.05,13.7)
  BOTTOM w0.125: U13.F5 18.18,17.33 18.18,17.11 17.48,16.41 17.48,13.47 arc(17.44,13.39) 17.35,13.35 17.18,13.35 arc(17.09,13.39) 17.05,13.47 v1(17.05,13.7)
CAM_RX0_0P: length 6.3
  TOP w0.125: v1(17.05,14.4) 16.62,13.97 16.62,13.52 17.07,13.07 U1.81
  BOTTOM w0.125: v1(17.05,14.4) 17.23,14.57 17.23,16.52 17.93,17.22 17.93,17.57 18.27,17.92 U13.E5
CAM_RX0_1N: length 6.2
  TOP w0.125: v1(19.6,14.65) 20.02,14.22 20.02,13.66 19.52,13.16 19.52,12.62
  BOTTOM w0.125: v1(19.6,14.65) 19.77,14.82 19.77,16.87 19.4,17.24 19.4,17.59 19.73,17.92 U13.E3
CAM_RX0_1P: length 6.2
  TOP w0.125: v1(19.6,13.95) 19.6,13.59 19.18,13.16 U1.75
  BOTTOM w0.125: U13.F3 19.73,17.27 20.02,16.97 20.02,13.71 arc(19.98,13.6) 19.86,13.55 19.73,13.55 arc(19.64,13.59) 19.6,13.68 v1(19.6,13.95)
CAM_RX0_3N: length 7.7
  TOP w0.125: v2(18.62,19.05) 18.57,19 18.57,17.51 17.48,16.41 17.48,15.14 17.82,14.79 17.82,13.42 18.12,13.12 U1.78
  BOTTOM w0.125: U13.D5 18.3,18.73 18.61,19.03 v2(18.62,19.05)
CAM_RX0_3P: length 7.8
  TOP w0.125: v2(17.9,19.05) 18.32,18.62 18.32,17.62 17.23,16.52 17.23,15.04 17.57,14.69 17.57,13.32 17.77,13.12 U1.79
  BOTTOM w0.125: U13.C5 17.94,19.05 v2(17.9,19.05)
CAM_RX0_4N: length 7.2
  TOP w0.125: v1(20.93,14.25) 20.75,14.07 20.75,13.63 20.25,13.13 20.25,12.62 U1.72
  BOTTOM w0.125: U13.F2 20.46,17.29 21.35,16.4 21.35,13.71 arc(21.29,13.56) 21.14,13.5 arc(20.99,13.56) 20.93,13.71 v1(20.93,14.25)
CAM_RX0_4P: length 7.2
  TOP w0.125: U1.73 19.88,13.11 20.5,13.74 20.5,14.53 v1(20.93,14.95)
  BOTTOM w0.125: v1(20.93,14.95) 21.1,15.12 21.1,16.29 20.1,17.29 20.1,18.36 U13.D3
CAM_RX0_CLKN: length 6.1
  TOP w0.125: U1.76 18.82,13.13 18.57,13.38 v1(18.57,13.65)
  BOTTOM w0.125: v1(18.57,13.65) 18.15,14.07 18.15,14.57 18.38,14.79 18.38,16.78 18.68,17.08 18.68,17.61 19,17.94 U13.E4
CAM_RX0_CLKP: length 6
  TOP w0.125: U1.77 18.48,13.13 18.15,13.45 18.15,14.48 arc(18.2,14.6) 18.32,14.65 18.4,14.65 arc(18.53,14.6) 18.57,14.48 v1(18.57,14.35)
  BOTTOM w0.125: U13.F4 18.93,17.35 18.93,16.98 18.62,16.68 18.62,14.4 v1(18.57,14.35)
CDS+: length 10.8
  TOP w0.125: U1.59 25.82,9.43 26.2,9.8 27.1,9.8 R52.2 R50.1 Q1.C R51.2
CHASSI_GND: length 108.1
  TOP w0.1: v2(17.9,18.4) 17.5,18.8 17.5,19.25 18.02,19.77 19.35,19.77 v2(19.35,19.73) ; v2(20.82,20.35) 20.43,20.75 17.57,20.75 v2(17.18,20.35)
  TOP w0.125: v1(13.35,4.05) 13.35,4.15 11.25,6.25 9.15,6.25 v1(9.15,6.75) ; v1(5.95,3.95) 5.95,3.25 6.97,2.23 9.8,2.23 v1(10,2.4)
  TOP w0.15: v1(8.95,26.95) 10.53,26.95 10.7,27.12 10.7,28.45 10.55,28.6 U6.2
  TOP w0.2: v1(21.05,4.55) 21.27,4.33 21.27,3.33 21.6,3 v1(21.6,2.8)
  TOP w0.3: R14.2 11,14.8 11.6,14.2 v1(11.6,14.1) ; J1.1 v1(5.1,16.3) ; v1(5.1,15.3) v1(2.55,15.3)
  TOP w0.4: v1(0.5,16.3) J1.1 ; v1(23.7,12.5) 24.3,13.1 C20.2 ; v1(2.55,15.3) J1.3 v1(0.5,15.3) ; v1(0.5,10.3) J1.13
  TOP w0.5: v1(5.75,28.2) 6.2,28.65 7.95,28.65 v1(8.45,28.15) ; v1(27.98,32.8) 28.52,33.35 J6.7 28.5,33.8 v1(28.5,34.8) ; v1(11.95,25.3) C88.2 11.85,24.55 U12.2 11.85,23.02 v1(12.35,22.52) ; v1(10.25,32.8) 9.93,33.12 J4.1 9.93,34.23 v1(10.65,34.95) ; C83.2 11.75,21.88 11.32,22.3 v1(11.32,22.32) ; v1(12.3,4.6) U4.4 ; U4.4 11.61,5.3 11.15,5.75 v1(9.9,5.75) ; U4.4 11.61,3.9 12,3.5 R15.2 ; v1(16.4,28.5) U11.2 ; J5.3 v1(32.8,9.18) ; v1(28.4,9.6) R52.1 ; C17.2 27.25,5.45 v1(27.25,5.4) ; v1(9.1,28.6) U6.2 ; C18.2 23.1,2.5 v1(23.5,2.1)
  POWER w0.4: 25.7,13.31 30.79,13.31 31.4,12.7 33.55,12.7 v1(33.55,12.45)
  POWER w0.5: v1(24.6,14) 25.7,12.9 ; 25.7,12.9 25.7,13.31 ; 25.7,12.9 v1(25.7,12.8) ; v1(16.55,4.6) 16.55,3.95 19.32,3.95 19.32,4.7 v1(19.18,4.85)
  BOTTOM w0.125: 34,5.85 v1(34,5.9) ; v1(14,16.85) C103.1
  BOTTOM w0.15: v1(15.25,20.25) 15.95,20.25 16.1,20.1 16.74,20.1 U13.B7
  BOTTOM w0.3: v2(17.18,17.75) 17.21,17.75 ; 17.21,17.75 17.22,17.75 U13.F6 17.16,17.05 v2(17.15,17.05) ; 17.21,17.75 U13.E6 17.58,18.08 v2(17.9,18.4) ; U13.B7 16.85,20.03 v2(17.18,20.35) ; v2(20.82,20.35) 20.87,20.35 U13.B1 21.6,20.03 22.1,20.53 v1(22.1,20.8) ; U13.D2 20.14,19.05 v2(20.1,19.05) 19.77,19.38 U13.C3 19.38,19.73 v2(19.35,19.73)
  BOTTOM w0.4: C35.2 4.12,24.18 U2.7 4.12,22.48 v1(3.85,22.2)
  BOTTOM w0.5: v1(3.45,28.9) 3.58,29.02 J3.2 5.5,29.02 5.75,28.77 v1(5.75,28.2) ; U15.3 31.5,14.44 31.66,14.6 v1(32.6,14.6) ; R36.2 20.85,35.2 U5.2 22.8,35.2 v1(22.8,34.8) ; v1(28.7,2.95) v1(28.7,3.65) 28.9,3.65 ; 9.7,5.2 v1(9.7,6.4) ; v1(35.35,12.95) 35.55,13.16 37.25,13.16 v1(37.5,12.95)
  BOTTOM w0.6: 9.7,5.2 U8.2 12.3,5.2 v1(12.3,4.6) ; C59.2 26.9,5.45 28.65,5.45 28.9,5.2 U7.2 28.9,3.65 ; U9.2 34,5.85
  vias: v1(0.5,31.15) v1(0.5,22.2) v1(0.53,19.45) v1(0.5,13.9) v1(0.5,8.2) v1(0.5,6.2) v1(0.5,4.2) v1(0.55,34.2) v1(0.57,28.65) v1(0.55,25.1) v1(1.3,17.3) v1(2,4.3) v1(2.8,7.55) v1(2.9,16.6) v1(3.5,34.25) v1(3.85,37.5) v1(4.1,33.35) v1(4.1,21.3) v1(4.1,20.25) v1(4.15,0.5) v1(4.8,25.7) v1(5,9.8) v1(5.1,1.3) v1(5.7,26.7) v1(5.75,9.05) v1(6,7.2) v1(6.2,32.3) v1(6.4,15.3) v1(6.5,2.95) v1(6.7,0.5) v1(7,20.9) v1(7,17) v1(7.35,6.75) v1(8.45,15.2) v1(8.75,37.5) v1(8.95,30.05) v1(8.88,21.95) v1(9,34.95) v1(9,16.2) v1(9.1,31.7) v1(9.2,25.3) v1(9.15,15.2) v1(9.25,5.75) v1(9.25,0.5) v1(9.3,2.4) v1(9.6,36) v1(9.7,3.7) v1(9.8,24.25) v1(9.85,7.3) v1(10.2,30.4) v1(10.6,22) v1(10.9,36.5) v1(10.9,16.2) v1(11.3,31.7) v1(11.3,0.5) v1(11.4,18.4) v1(11.8,16.7) v1(11.8,13.2) v1(12.05,37.5) v1(12.25,36.2) v1(12.2,17.55) v1(12.6,14.5) v1(12.6,3.9) v1(12.85,34.8) v1(12.8,10.6) v1(12.9,32.8) v1(13.6,0.5) v1(14,32.6) v1(14,28.3) v1(14.1,31.3) v1(14.1,20.45) v1(14.3,22.15) v1(14.5,25.85) v1(14.65,11.85) v1(14.7,9.45) v1(14.9,37.5) v1(15.25,4.6) v1(15.4,34) v1(15.4,32.5) v1(15.4,16.55) v1(15.6,28.5) v1(15.85,22.7) v1(15.8,10.95) v1(15.75,0.5) v1(15.9,4.6) v1(16.1,15.7) v1(16.2,5.95) v1(16.3,31.3) v1(16.3,10.4) v1(16.5,27.5) v1(16.5,14.8) v1(16.6,11.1) v1(16.68,16.4) v1(16.75,23.7) v1(16.9,8.9) v1(17.1,6.7) v1(17.45,1.65) v1(17.6,11.85) v1(17.8,28.5) v1(17.8,27.7) v1(17.9,6.7) v1(18.2,26.45) v1(18.4,30.9) v1(18.5,21.95) v1(18.6,6.7) v1(18.8,1.7) v1(18.9,9.1) v1(19.1,34.3) v1(19.1,33.6) v1(19.07,26.18) v1(19.1,15.1) v1(19.1,6.2) v1(19.25,16.65) v1(19.2,10.2) v1(19.4,24.9) v1(19.5,11) v1(19.75,37.5) v1(19.75,11.85) v1(19.8,9.8) v1(19.8,8.8) v1(19.8,6.85) v1(19.8,6.2) v1(19.85,26.8) v1(20,1) v1(20.32,34.6) v1(20.4,30.8) v1(20.65,28.55) v1(21,32.8) v1(21.1,0.5) v1(21.75,16.9) v1(21.85,37.5) v1(21.85,21.9) v1(21.9,15.75) v1(21.85,14.75) v1(21.9,11.2) v1(21.9,10.5) v1(21.95,8.1) v1(22.15,29.35) v1(22.15,27.1) v1(22.2,25.45) v1(22.23,13.38) v1(22.5,4) v1(23.12,36.47) v1(23.15,3.9) v1(23.45,25.45) v1(23.45,23.2) v1(23.45,21.4) v1(23.5,34.8) v1(23.5,15.75) v1(23.65,28.3) v1(23.55,18.9) v1(23.9,8.6) v1(24.15,29.5) v1(24.05,10.25) v1(24.3,37.5) v1(24.4,11.5) v1(24.6,17.1) v1(24.55,4.1) v1(24.95,32.8) v1(24.85,8.95) v1(25.25,0.5) v1(25.6,9.9) v1(25.7,8) v1(25.8,28.2) v1(25.8,24.25) v1(25.8,21.8) v1(25.95,37.5) v1(25.85,30.45) v1(25.9,17.1) v1(25.9,15.7) v1(26.4,3.35) v1(26.4,2.7) v1(26.5,11.8) v1(27.06,14.42) v1(27.1,4.1) v1(27.25,16.85) v1(27.25,0.5) v1(27.3,20.8) v1(27.73,28.3) v1(27.7,11.1) v1(27.75,29.5) v1(28,25.45) v1(28.25,15.75) v1(28.42,26.79) v1(28.4,14.6) v1(28.8,5.4) v1(29,8.6) v1(29.05,37.5) v1(29.3,24.3) v1(29.3,14.8) v1(29.3,3.3) v1(29.35,15.75) v1(29.4,9.6) v1(29.53,26.79) v1(29.8,13) v1(29.9,3.65) v1(29.9,2.95) v1(30.05,37.5) v1(30.15,29) v1(30.3,0.5) v1(30.45,35.95) v1(30.45,21.2) v1(30.5,9.6) v1(30.7,11.1) v1(30.85,17) v1(30.85,4.75) v1(31.05,37.1) v1(31.07,33.55) v1(31.21,26.17) v1(31.3,20.3) v1(31.4,7.45) v1(31.75,8.2) v1(31.9,10.8) v1(32.15,1.1) v1(32.2,4.4) v1(32.2,3.7) v1(32.3,7.65) v1(32.35,34.35) v1(32.55,5.85) v1(32.6,21.35) v1(33,29.45) v1(33.2,17) v1(33.23,15.75) v1(33.25,6) v1(33.35,26.23) v1(33.5,18.8) v1(34,17.15) v1(34.2,37.5) v1(34.2,0.5) v1(34.27,34.4) v1(34.35,15) v1(34.98,29.5) v1(34.95,16.2) v1(35.49,28.11) v1(35.5,6.6) v1(35.62,25.52) v1(35.8,32.95) v1(36,8) v1(36.3,18.95) v1(36.95,21.45) v1(37.1,8.6) v1(37.4,11.2) v1(37.48,33.95) v1(37.48,28.64) v1(37.5,25.4) v1(37.5,22.65) v1(37.5,16.3) v1(37.5,6.7) v1(37.5,3.95) v2(17.93,16.25) v2(17.95,15.35) v2(20.45,16.4) v2(20.45,15.38)
EPHY_LNK: length 7.7
  TOP w0.125: U1.55 23.45,8.03 23.85,7.62 24.88,7.62 25.25,7.25 29.35,7.25 R59.2
EPHY_RXN: length 17.6
  TOP w0.125: U1.62 23.05,10.47 23.1,10.53 23.63,10.53 23.86,10.75 24.72,10.75 26.55,12.58 26.55,15.06 27.74,16.25 34.24,16.25 35.15,17.16 35.15,17.75 R13.1
EPHY_RXP: length 17.5
  TOP w0.125: U1.63 23.05,10.82 23.1,10.78 23.53,10.78 23.75,11 24.61,11 26.3,12.69 26.3,15.16 27.64,16.5 34.14,16.5 34.9,17.26 34.9,17.81 arc(34.85,17.95) 34.71,18 R12.1
EPHY_SPD: length 5.9
  TOP w0.125: R58.1 27.8,7.5 25.38,7.5 25,7.88 23.98,7.88 23.48,8.38 U1.56
EPHY_TXN: length 8.2
  TOP w0.125: 22.73,11.18 23.05,11.18 23.1,11.22 23.42,11.22 25.4,13.2 25.4,17.5 R5.1
EPHY_TXP: length 8.1
  TOP w0.125: R3.1 24.96,17.8 arc(25.1,17.75) 25.15,17.61 25.15,13.3 23.32,11.47 23.1,11.47 23.05,11.53 U1.65
I2C_ID_SEL: length 4.5
  BOTTOM w0.125: U13.A5 17.35,21.6 R70.2 17.23,22.73 17.23,24.27 R69.1
INCK: length 15.7
  TOP w0.125: R67.1 v1(14.62,16.4)
  POWER w0.125: v2(21.75,18.8) 21.75,20 20.5,21.25 15.45,21.25 14.62,20.43 v1(14.62,16.4)
  BOTTOM w0.125: U13.C2 20.48,19.38 20.81,19.05 21.5,19.05 v2(21.75,18.8)
IOIN: length 19.9
  TOP w0.125: J1.16 4.3,8.8 5,8.1 5,3 6.53,1.48 14.72,1.48 16.38,3.12 16.38,3.77
IOOUT: length 22.6
  TOP w0.125: J1.17 4.4,8.3 4.75,7.95 4.75,2.85 6.38,1.23 14.88,1.23 16.73,3.08 16.73,3.77
IOVDD: length 25.6
  TOP w0.125: 20.8,18.4 v2(20.82,18.4)
  TOP w0.2: 20.23,3.77 20.23,4.33 v1(20,4.55) 19.85,4.4 19.35,4.4 19.18,4.22 19.18,3.77 ; v1(16.75,11.85) 16.73,11.85 U1.82 ; U1.68 21.62,11.97 v1(21.5,11.85) ; v1(14.7,10.35) 14.57,10.47 U1.5
  TOP w0.5: v1(21.85,17.7) C101.2 21.1,18.12 v2(20.82,18.4) ; v2(19.38,18.4) C100.2 20.8,18.4 ; C98.1 v1(17.7,23.7) 17.75,23.75 18.7,23.75 v1(19.2,24.25) v1(19.9,24.25) v1(21.25,24.25) v1(21.9,24.25) ; v1(31.3,10.4) R50.2
  BOTTOM w0.125: 20.2,23.6 R63.2 ; v1(21.85,17.7) 21.8,17.75
  BOTTOM w0.3: U13.E2 20.5,18.08 v2(20.82,18.4) ; v2(19.38,18.4) 19.05,18.73 U13.D4
  BOTTOM w0.5: v1(19.2,24.25) R68.2 20.2,23.6 ; v1(17.7,23.7) R69.2 ; v1(21.85,17.7) 22.3,17.25 C8.1 ; v1(21.9,24.25) 22.25,23.9 R66.2 R65.2 v1(21.25,24.25) ; v1(21.5,11.85) C11.1 ; C7.1 20.1,3.35 20,3.45 C19.1 v1(20,4.55) ; v1(14.7,10.35) 14.75,10.35 C9.1 ; v1(16.75,11.85) C10.1
  vias: v1(35.9,9.95) v1(35.9,9.3) v1(36.55,9.95) v1(36.55,9.3)
IRCUT_ENA: length 19
  TOP w0.125: v1(34.85,11.5) 35.15,11.2 35.15,7.3 34.55,6.7 32.33,6.7 32.12,6.5 24.88,6.5 24.5,6.88 23.45,6.88 23.35,6.97 U1.52
  BOTTOM w0.125: v1(34.85,11.5) 35.24,11.89 U15.8
IRCUT_ENB: length 23.3
  TOP w0.125: v1(34.3,13.1) 35.4,12 35.4,7.2 34.65,6.45 32.45,6.45 32.25,6.25 24.75,6.25 24.38,6.62 U1.51
  BOTTOM w0.125: U15.5 36.05,15.71 35.5,15.15 35.5,14.3 v1(34.3,13.1)
IRLED_PWM: length 17.5
  TOP w0.125: J5.1 33.98,11.68 34.9,10.75 34.9,7.4 34.44,6.94 32.19,6.94 32,6.75 25,6.75 24.62,7.12 23.6,7.12 23.4,7.33 U1.53
LNK_LED: length 35.2
  TOP w0.125: J6.2 22.27,33.62 23.95,31.95 v1(24.8,31.95) ; v1(32.6,13.95) 32.9,13.65 32.9,10 R59.1
  POWER w0.125: v1(24.8,31.95) 25.3,31.45 25.3,15.45 26.8,13.95 v1(32.6,13.95)
MEMS_MIC1_VDD: length 4.3
  TOP w0.5: R27.1 C39.2 R28.2 C40.2 R26.1
MIC1_OUTPUT: length 4
  TOP w0.125: R27.2 v1(3.45,30.7) R29.1 C41.2
  BOTTOM w0.125: v1(3.45,30.7) 3.85,30.7 4.28,30.27 J3.1
PWM0_BUCK: length 12.7
  TOP w0.125: U1.58 24.07,9.07 24.65,8.5 25.85,8.5 26.45,9.1 v1(30,9.1) ; R42.1 v1(30.9,5.4)
  POWER w0.125: v1(30.9,5.4) 30.9,8.2 v1(30,9.1)
PWR_SEQ2: length 47.2
  TOP w0.125: v1(20.93,3) 20.93,3.77 ; U6.1 v1(9.1,27.65)
  POWER w0.125: v1(20.93,3) 20,3 19.55,3.45 11.57,3.45 10.2,4.83 7.22,4.83 7.05,4.65 5.65,4.65 3.65,6.65 3.65,8.95 2.2,10.4 2.2,13.5 3.35,14.65 3.35,25.6 5.4,27.65 v1(9.1,27.65)
PWR_VBAT_DET: length 2.8
  TOP w0.2: 19.88,3.77 19.88,3.02 R20.2 20.8,2.1 R18.1
PWRDOWN: length 2.6
  BOTTOM w0.125: R63.1 20.25,22.25 19.4,21.4 19.4,21.08 U13.A4
RESET: length 21.3
  TOP w0.125: J1.18 4.25,7.8 4.5,7.55 4.5,5.65 v1(4.25,5.4) 4.5,5.15 4.5,2.7 6.22,0.97 15.03,0.97 17,2.95 17,3.4 17.07,3.48 17.07,3.77
  BOTTOM w0.125: R19.2 v1(4.25,5.4)
RX_D+: length 25
  TOP w0.125: 33.55,31.1 33.55,29.44 arc(33.75,28.97) 34.22,28.77 36.6,28.77 37.25,29.43 37.25,32.63 36.03,33.85 32.1,33.85 31.2,34.75 31.2,36.25 30.75,36.7 27.73,36.7 26.55,35.52 26.55,34.55 26.02,34.02 J6.5
  TOP w0.126: U10.11 33.55,31.14 33.55,31.1
RX_D-: length 25.2
  TOP w0.125: J6.6 27.27,34.02 26.8,34.5 26.8,35.42 27.83,36.45 30.65,36.45 30.95,36.15 30.95,34.64 31.99,33.6 35.93,33.6 37,32.53 37,29.53 36.49,29.02 34.22,29.02 arc(33.92,29.15) 33.8,29.45 33.8,29.6 arc(33.91,29.87) 34.17,29.98 35.58,29.98 36.15,30.55 U10.9
SD_PWR_EN: length 12.6
  TOP w0.125: J1.10 5.08,11.8 5.55,11.32 5.55,10.32 6.62,9.25 10.88,9.25 13.15,6.97 U1.15
SD_SD0_CD: length 15.7
  TOP w0.125: U1.14 13.18,7.33 11,9.5 6.75,9.5 5.8,10.45 5.8,11.45 4.95,12.3 3.3,12.3 v1(2.8,12.8)
  BOTTOM w0.125: v1(2.8,12.8) 2.7,12.9 R2.1 C4.1
SD_SD0_CLK: length 13.9
  TOP w0.125: J1.2 5.3,15.8 5.6,15.5 5.6,13.9 7.3,12.2 7.3,11.2 7.5,11 11.75,11 12.62,10.12 U1.6
SD_SD0_CMD: length 12.7
  TOP w0.125: J1.4 4.33,14.8 7.05,12.07 7.05,11.07 7.38,10.75 11.62,10.75 12.6,9.78 13.88,9.78
SD_SD0_D0: length 14.9
  TOP w0.125: U1.8 12.57,9.43 11.5,10.5 7.25,10.5 6.8,10.95 6.8,11.95 4.45,14.3 J1.5
SD_SD0_D1: length 12.7
  TOP w0.125: U1.10 12.9,8.72 11.38,10.25 7.12,10.25 6.55,10.82 6.55,11.82 4.58,13.8 J1.6
SD_SD0_D2: length 15
  TOP w0.125: J1.7 4.7,13.3 6.3,11.7 6.3,10.7 7,10 11.25,10 12.88,8.38 U1.11
SD_SD0_D3: length 12.6
  TOP w0.125: J1.8 4.83,12.8 6.05,11.57 6.05,10.57 6.88,9.75 11.12,9.75 12.85,8.03 U1.12
SPD_LED: length 37.2
  TOP w0.125: v1(32.4,13.3) 32.65,13.05 32.65,10.12 30.82,8.3 29.4,8.3 R58.2 ; J6.1 21.05,33.77 21.05,33.55 21.72,32.88 22.65,32.88 23.83,31.7 24.35,31.7 v1(24.8,31.25)
  POWER w0.125: v1(24.8,31.25) 25.05,31 25.05,15.32 26.68,13.7 32,13.7 v1(32.4,13.3)
SPI_CLK: length 15.1
  TOP w0.125: 13.88,4.88 13.35,4.88 10.22,8 8.88,8 8.47,7.6 7.9,7.6 v1(7.6,7.9) ; v1(9.05,13.8) R30.2
  POWER w0.125: v1(9.05,13.8) 8.5,13.25 8.5,12.97 7.6,12.07 v1(7.6,7.9)
SPI_CS_X: length 11.5
  TOP w0.125: 15.32,3.77 15.32,3.27 14.28,2.23 10.9,2.23 10.18,2.95 8.95,2.95 7.79,4.11 7.79,4.6 R31.2
SPI_HOLD_X: length 14.5
  TOP w0.125: U1.20 13.38,5.22 10.35,8.25 8.45,8.25 v1(8.25,8.05) ; v1(9.05,13.15) 9.05,12 U4.7
  POWER w0.125: v1(9.05,13.15) 7.85,11.95 7.85,8.45 v1(8.25,8.05)
  BOTTOM w0.125: v1(9.05,13.15) R32.2
SPI_MISO: length 8.3
  TOP w0.125: 14.97,3.77 14.97,3.33 14.12,2.48 11.03,2.48 10.3,3.2 9.3,3.2 9.06,3.44 U4.2
SPI_MOSI: length 21.5
  TOP w0.125: U4.5 11.61,12.49 11.1,13 11.1,14.1 10.9,14.3 10.3,14.3 R14.1 9.35,14.8 v1(9.05,14.5) R11.2 ; v1(6.95,7.9) 7.5,7.35 8.6,7.35 9,7.75 10.1,7.75 13.32,4.53 U1.22
  POWER w0.125: v1(6.95,7.9) 7.35,8.3 7.35,12.2 8.25,13.1 8.25,13.7 v1(9.05,14.5)
SPI_SCK: length 1.9
  TOP w0.125: 10.34,12 10.34,13.54 R30.1
SPI_VCC: length 19.3
  TOP w0.2: 23.05,12.03 22.88,12.03 U1.66 ; v1(14.7,7.65) 14.7,7.67 13.88,7.67 ; U1.57 21.98,8.72 v1(21.95,8.75)
  TOP w0.4: 3.35,10.8 J1.12 4.55,10.8 v1(4.85,10.5) ; J1.11 2.4,11.3 v1(2.85,10.85)
  TOP w0.5: U11.3 15.45,29.8 15.85,30.2 16.9,30.2 17.35,29.75 U11.1 ; v1(8.25,23.8) R37.1 C54.2 ; 23.05,12.03 23.05,13 23.35,13.3 C20.1 23.5,14 v1(23.9,14.4) ; v1(6,6.05) R31.1 ; C56.1 10.65,26.1 C55.1
  BOTTOM w0.5: R19.1 5.7,5.75 v1(6,6.05) ; R7.1 v1(8.25,23.8) R6.1 ; v1(21.95,8.75) C21.1 ; C22.1 C23.1 v1(14.7,7.65)
  vias: v1(6.45,14.6) v1(6.45,13.95) v1(11.65,26.65) v1(11.65,25.95) v1(12.35,26.65) v1(12.35,25.95) v1(18.15,29.55) v1(18.85,29.55)
SPI_WP_X: length 6
  TOP w0.125: 14.62,3.77 14.62,3.42 13.93,2.73 11.68,2.73 R15.1 10.34,4.07 10.34,4.6
SPK_EN: length 19.4
  TOP w0.125: v1(4.9,11.3) 5.3,10.9 5.3,10.2 6.5,9 10.72,9 13.45,6.28 13.88,6.28
  BOTTOM w0.125: v1(4.9,11.3) 4.55,11.65 4.55,18.25 4.78,18.48 4.78,18.95
SYS_XTAL_IN: length 4.4
  TOP w0.2: U1.45 23.23,4.53 R8.1 C18.1 25.2,1.5 Y1.3
SYS_XTAL_OUT: length 5.5
  TOP w0.2: Y1.1 27.35,3.1 26.45,4 25.75,4 C17.1 R8.2 23.68,4.88 22.73,4.88
TX_D+: length 23
  TOP w0.125: J6.3 23.52,34 24.02,34.5 24.02,35.01 23.46,35.58 20.64,35.58 19.85,34.79 19.85,33.1 23.93,29.02 29.05,29.02 arc(29.39,29.16) 29.52,29.5 29.52,29.64 arc(29.43,29.88) 29.19,29.98 27.8,29.98 27.25,30.52 U10.16
TX_D-: length 22.8
  TOP w0.125: J6.4 24.77,34 24.27,34.5 24.27,35.12 23.57,35.83 20.53,35.83 19.6,34.89 19.6,33 23.82,28.77 29.05,28.77 arc(29.56,28.99) 29.77,29.5 29.77,31.2 29.8,31.2
UART0_RX: length 27.1
  TOP w0.125: 13.88,5.58 13.4,5.58 10.47,8.5 6.9,8.5 v1(6.3,7.9)
  POWER w0.125: v1(6.85,23) 6.5,22.65 6.5,16.7 8,15.2 8,13.22 7.1,12.32 7.1,8.7 v1(6.3,7.9)
  BOTTOM w0.125: R6.2 v1(6.85,23) 6.55,23.3 R10.2
UART0_TX: length 29
  TOP w0.125: U1.18 13.43,5.92 10.6,8.75 6.5,8.75 v1(6.3,8.55)
  POWER w0.125: v1(6.3,8.55) 6.85,9.1 6.85,12.45 7.75,13.35 7.75,15.1 6.25,16.6 6.25,23.15 6.6,23.5 7.75,23.5 v1(8.25,23)
  BOTTOM w0.125: R7.2 v1(8.25,23) 8,22.75 8,22.45 R9.2
UART1_RX: length 21.9
  TOP w0.125: 16.02,3.77 16.02,3.17 14.57,1.73 6.67,1.73 5.25,3.15 5.25,8.25 4.65,8.85 4.65,9.1 4.45,9.3 J1.15
UART1_TX: length 19.3
  TOP w0.125: 15.68,3.77 15.68,3.23 14.43,1.98 6.83,1.98 5.5,3.3 5.5,8.35 4.9,8.95 4.9,9.22 4.33,9.8 J1.14
USB_DM: length 37.8
  TOP w0.125: v1(12.2,34.95) 11.93,34.67 11.93,34.48 12.43,33.98 J4.3 ; v1(11.4,32.65) 11.68,32.38 11.68,32.13 11.98,31.82 18.26,31.82 22.73,27.36 22.73,14.89 21,13.16 21,13 20.93,12.93 U1.70
  BOTTOM w0.125: v1(12.2,34.95) 11.9,35.25 11.9,35.6 11.55,35.95 10.45,35.95 9.95,35.45 9.95,34.33 10.58,33.7 11.37,33.7 11.68,33.4 11.68,32.92 v1(11.4,32.65)
USB_DP: length 37.1
  TOP w0.125: J4.2 11.18,33.95 11.7,34.48 11.7,34.65 v1(11.4,34.95) ; U1.69 21.27,12.93 21.23,12.97 21.23,13.07 22.95,14.8 22.95,27.45 18.35,32.05 12.08,32.05 11.9,32.23 11.9,32.35 v1(12.2,32.65)
  BOTTOM w0.125: v1(12.2,32.65) 11.9,32.95 11.9,33.49 11.46,33.92 10.67,33.92 10.18,34.42 10.18,35.36 10.54,35.73 11.45,35.73 11.68,35.5 11.68,35.23 v1(11.4,34.95)
USB_VBUS_DET: length 6
  TOP w0.2: 22.73,9.78 24.77,9.78 25.5,10.5 26.15,10.5 26.7,11.05 R56.2 R55.1
WLED_PWM: length 15.8
  TOP w0.125: 22.73,7.67 23.43,7.67 23.73,7.38 24.75,7.38 25.12,7 31.88,7 32.08,7.2 34.35,7.2 34.65,7.5 34.65,9.75 33.98,10.43 J5.2
N19124268: length 9.6
  TOP w0.5: U10.15 28.52,32.17 v1(28.95,32.6) ; U10.10 v1(34.88,32.6)
  BOTTOM w0.5: 32.45,32.6 DA4.N ; 32.45,32.6 v1(34.88,32.6) ; 32.45,32.6 R57.1 v1(28.95,32.6)
N19124326: length 3
  TOP w0.5: U10.7 34.88,23.62 v1(34.05,24.45)
  BOTTOM w0.5: C78.2 v1(34.05,24.45)
N19178192: length 1.4
  BOTTOM w0.5: C45.1 22.5,33.7 U5.1
N19178196: length 3.6
  BOTTOM w0.5: L1.1 23.3,31.6 C45.2 24.45,34.2 U5.6
N19178310: length 3.1
  BOTTOM w0.5: C46.1 R34.2 R36.1 U5.3
N19178371: length 1.2
  BOTTOM w0.5: U5.4 R35.1
N19299837: length 2.6
  BOTTOM w0.5: R46.2 U8.5 7.95,6.15 R44.1
N19299849: length 2.5
  BOTTOM w0.5: U8.1 C69.1 12,7.1 R45.1
N19981677: length 5.1
  TOP w0.5: v1(28.8,1.2) R39.2 C57.1 R41.2
  BOTTOM w0.5: v1(28.8,1.2) U7.5 R43.1
N19981766: length 2
  TOP w0.5: R41.1 C63.1 R42.2
N20100926: length 2
  TOP w0.5: L2.1 U6.3
N20101039: length 3.1
  TOP w0.5: R37.2 C54.1 R38.1 U6.5
N20359461: length 2.3
  TOP w0.5: R60.2 U11.4 R61.2
N20419535: length 2.2
  BOTTOM w0.3: C102.2 15.22,18.08 U13.E7
N20419548: length 2
  BOTTOM w0.3: C103.2 14.87,17.43 U13.F7
N20419561: length 3.1
  BOTTOM w0.3: C104.2 16.77,21.45 U13.A6
N20419574: length 2.3
  BOTTOM w0.3: U13.D7 15.58,18.73 14.83,19.48 C105.2
N20435624: length 2.2
  BOTTOM w0.5: C74.1 U9.3 R47.2
N20543108: length 3.6
  TOP w0.125: C2.2 13.3,11.65 13.43,11.53 U1.2
N20543141: length 3.1
  TOP w0.125: C3.1 12.4,12.4 12.4,11.65 13.22,10.82 U1.4
N20543163: length 3.3
  TOP w0.2: 13.88,11.18 13.32,11.18 12.85,11.65 v1(12.85,11.9)
  BOTTOM w0.5: C6.2 C5.2 12.5,12.25 v1(12.85,11.9)
N20543994: length 15.4
  BOTTOM w0.125: R9.1 6.05,22.7 6.05,24.85 6.25,25.05 6.25,30.85 4.95,32.15 4.95,33.65 4.35,34.25 4.35,34.98 J8.2
N20546407: length 2.5
  TOP w0.4: J2.1 4.65,23.32 v1(4.65,22.15)
  BOTTOM w0.4: 4.78,23.25 4.78,22.27 v1(4.65,22.15)
N20546461: length 2.8
  BOTTOM w0.4: U2.2 4.12,18.02 C37.2 3.48,18.02 3.48,18.95
N20546469: length 6
  TOP w0.4: J2.2 4.25,24.62 3.5,23.88 3.5,23.15 v1(2.55,22.2)
  BOTTOM w0.4: U2.5 2.83,22.66 2.82,22.65 2.82,22.47 v1(2.55,22.2) 2,22.2 R4.1
N20546492: length 3
  BOTTOM w0.125: U2.4 2.83,19.4 2.3,19.93 1.57,19.93 R25.1 R4.2
N20548092: length 10.6
  BOTTOM w0.125: R10.1 6.55,30.95 5.22,32.27 J8.1
N20549401: length 1.6
  BOTTOM w0.5: C80.2 29.05,30.55 29.65,31.15 R57.2
N20551524: length 2.5
  TOP w0.5: U10.2 28.52,24.32 v1(28.5,24.35)
  BOTTOM w0.5: C77.2 v1(28.5,24.35)
N20551619: length 7
  TOP w0.125: 29.8,22.8 29.8,22.14 29.12,21.48 27.26,21.48 26.25,20.47 D2.P 26.25,20.05 25.7,19.5 R5.2
N20551621: length 6.9
  TOP w0.125: R3.2 24.7,19.4 24.05,20.05 D2.N 24.05,20.45 24.8,21.2 26.63,21.2 26.8,21.37 26.8,21.7 27.25,22.16 U10.1
N20551631: length 5
  TOP w0.125: U10.6 33.6,22.14 34.3,21.45 34.3,21.1 33.8,20.6 D3.N 33.8,20.2 34.65,19.35 34.65,19.05 R12.2
N20551633: length 4.9
  TOP w0.125: U10.8 36.15,22.14 35.5,21.5 35.5,21.1 36,20.6 D3.P 36,20.2 35.15,19.35 35.15,19.05 R13.2
N20557326: length 2.3
  TOP w0.125: Q1.B R54.2 R53.2
N20557495: length 8.9
  TOP w0.125: v1(31.1,9.2) 31.4,9.5 31.65,9.5 32.4,10.25 32.4,11.9 R51.1 R53.1 ; 33.8,7.92 32.8,7.92 v1(32.4,8.3)
  POWER w0.125: v1(32.4,8.3) 31.9,8.8 31.5,8.8 v1(31.1,9.2)
N20559056: length 2.5
  BOTTOM w0.125: R64.2 21.67,18.25 U13.D1
N20604743: length 11.1
  BOTTOM w0.3: J7.2 33.58,21.43 31.7,19.55 C108.2 31,16.3 30.1,16.3 29.9,16.1 29.9,13.7 30.43,13.16 30.8,13.16
N20605010: length 6.1
  BOTTOM w0.3: J7.1 33.58,20.18 32.51,19.11 32.51,17.07 C108.1 32.5,16.9 31.3,15.71 U15.4
N20631063: length 2
  TOP w0.125: J1.9 2.6,12.3 v1(2.8,12.1)
  BOTTOM w0.125: R2.2 v1(2.8,12.1)
N205430461: length 1.4
  TOP w0.125: 19.52,2.49 C1.1
  TOP w0.2: 19.52,3.77 19.52,2.49

## Copper pours and planes (outline as drawn; the poured copper is in the pictures)
12V_IN on BOTTOM (solid shape): 29.85,36.35 29.99,36.29 30.05,36.15 30.05,35.83 30.07,35.76 30.11,35.69 30.24,35.56 30.28,35.49 30.3,35.42 30.3,34.65 30.24,34.51 30.1,34.45 29.15,34.45 29.01,34.51 28.95,34.65 28.95,35.05 28.89,35.19 28.75,35.25 28.3,35.25 28.16,35.19 28.1,35.05 28.1,34.9 24.2,34.9 24.06,34.96 24,35.1 24,35.4 24.06,35.54 24.2,35.6 26.1,35.6 26.24,35.66 26.3,35.8 26.3,35.95 27.7,35.95 27.84,36.01 27.96,36.29 28.1,36.35
AVDD on TOP (solid shape): 17.45,27.3 17.59,27.24 17.65,27.1 17.65,25.35 17.59,25.21 17.45,25.15 17,25.15 16.86,25.09 16.8,24.95 16.8,24.43 16.78,24.36 16.74,24.29 15.51,23.06 15.47,22.99 15.45,22.92 15.45,21.65 15.51,21.51 15.65,21.45 18.65,21.45 18.79,21.51 18.85,21.65 18.85,21.75 21.34,21.75 21.56,21.52 21.34,21.3 20.85,21.3 20.71,21.24 20.65,21.1 20.65,20.95 17.45,20.95 16.57,20.58 16.2,19.7 16,19.5 15.8,19.7 15.8,20.27 15.78,20.34 15.74,20.41 14.75,21.4 14.75,23.45 15.94,24.64 15.98,24.71 16,24.78 16,26.25 17.05,27.3
P5V_IN on POWER: outline of 521 points within 0.7,0.25 34,34.5
VDDC on BOTTOM (solid shape): 28.25,5.9 24.95,5.9 24.3,5.25 21.85,5.25 21.45,5.65 21,5.65 21,7.2 26.4,7.2 27.1,7.9 28.25,7.9
CHASSI_GND on TOP: 0.25,37.65 0.28,37.72 0.35,37.75 37.65,37.75 37.72,37.72 37.75,37.65 37.75,0.35 37.72,0.28 37.65,0.25 0.35,0.25 0.28,0.28 0.25,0.35 ; 8 cut-outs
